# Altium PCB BoardA.PcbDoc
Units mm, origin at the board's own origin, x right, y up, seen from the top; angles counter-clockwise.
Board outline 38.39 x 38.39 mm, 4 copper layers (Top Layer, Int1, Int2, Bottom Layer), stack 1.622 mm thick; 85 components, 48 nets, 258 pads, 4 vias.
Unrouted connection lines stored in the file: 193.
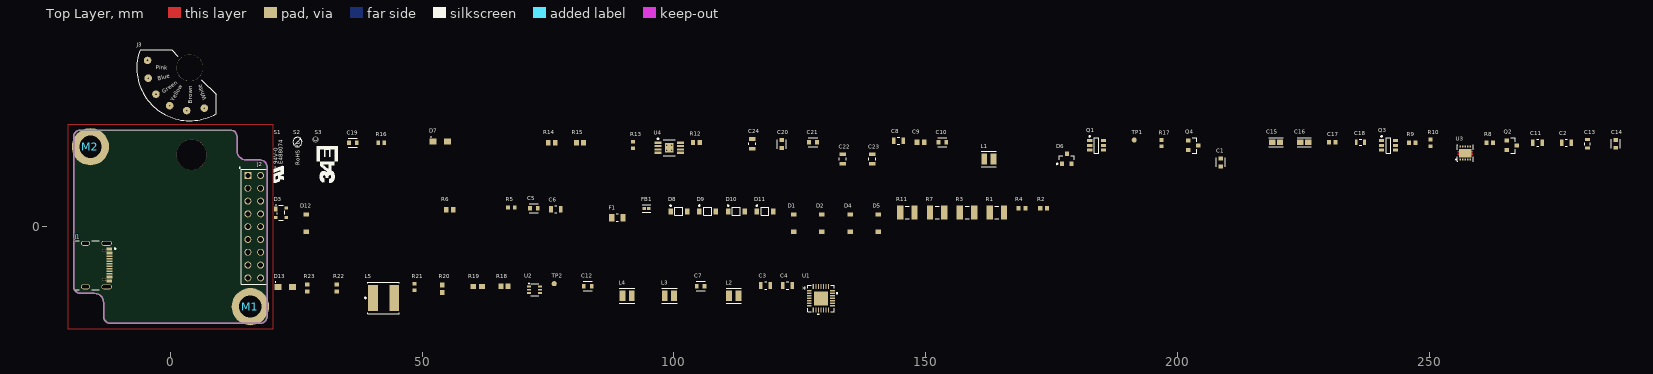
[diagram p0: Top Layer view]
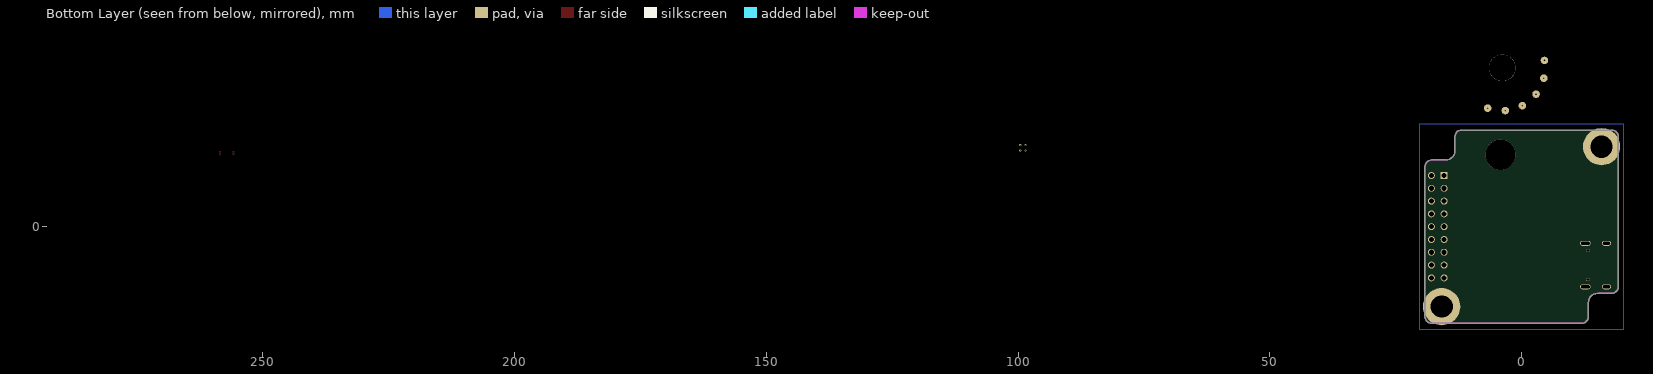
[diagram p1: Bottom Layer view, seen from below]
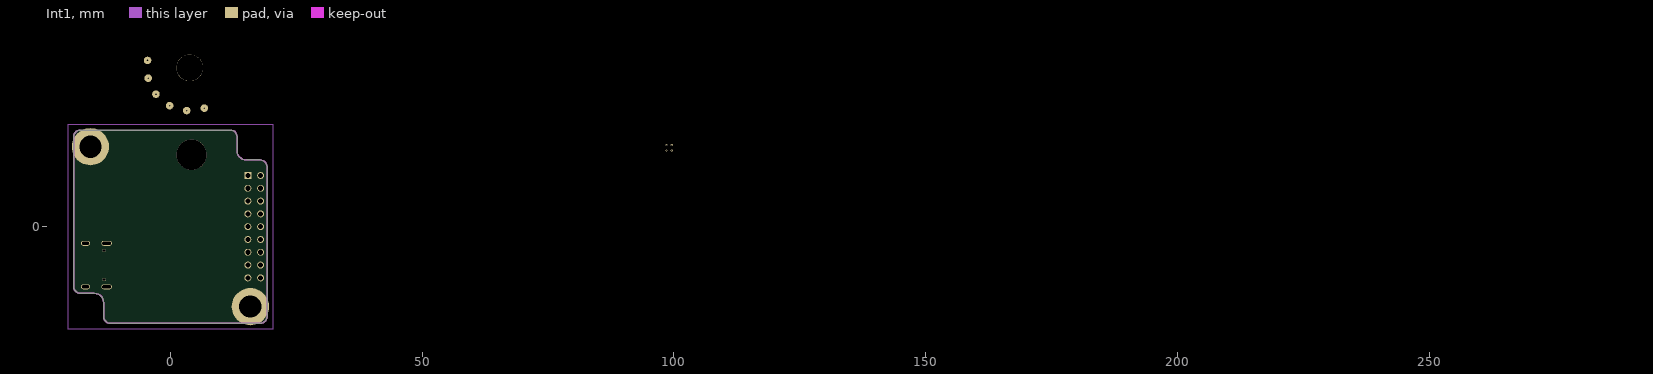
[diagram p2: Int1]
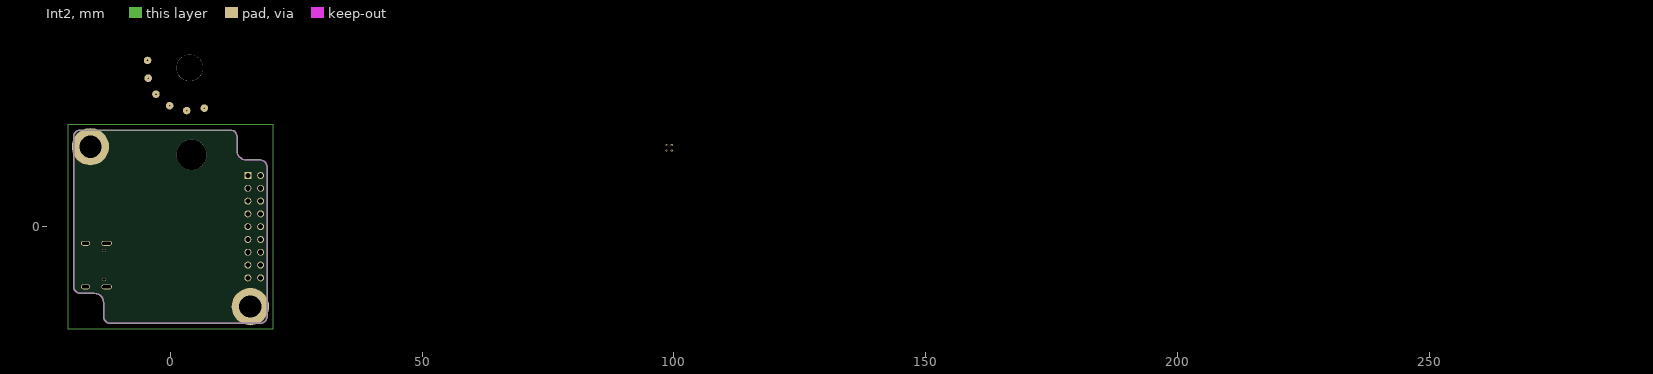
[diagram p3: Int2]

## Layer stack, top to bottom
Top Solder: solder mask 0.0254, SM-002, Dk 4
Top Layer: signal copper 0.07
Dielectric 1: prepreg 0.1092, PP-017, Dk 4.3
Int1: signal copper 0.035
Dielectric 3: core 1.1938, Core-039, Dk 4.8
Int2: signal copper 0.035
Dielectric 5: prepreg 0.1092, PP-017, Dk 4.3
Bottom Layer: signal copper 0.07
Bottom Solder: solder mask 0.0254, SM-002, Dk 4

## Board outline
-19.193,-11.906 -19.159,-12.203 -19.061,-12.485 -18.902,-12.738 -18.691,-12.949 -18.438,-13.108 -18.156,-13.206 -17.859,-13.24 -15.081,-13.24 -14.671,-13.286 -14.282,-13.422 -13.933,-13.642 -13.642,-13.933 -13.422,-14.282 -13.286,-14.671 -13.24,-15.081 -13.24,-17.859 -13.206,-18.156 -13.108,-18.438 -12.949,-18.691 -12.738,-18.902 -12.485,-19.061 -12.203,-19.159 -11.906,-19.193 17.859,-19.193 18.156,-19.159 18.438,-19.061 18.691,-18.902 18.902,-18.691 19.061,-18.438 19.159,-18.156 19.193,-17.859 19.193,11.906 19.159,12.203 19.061,12.485 18.902,12.738 18.691,12.949 18.438,13.108 18.156,13.206 17.859,13.24 15.081,13.24 14.671,13.286 14.282,13.422 13.933,13.642 13.641,13.933 13.422,14.282 13.286,14.671 13.24,15.081 13.24,17.859 13.206,18.156 13.108,18.438 12.949,18.691 12.738,18.902 12.485,19.061 12.203,19.159 11.906,19.193 -17.859,19.193 -18.156,19.159 -18.438,19.061 -18.691,18.902 -18.902,18.691 -19.061,18.438 -19.159,18.156 -19.193,17.859

## Design rules (kind name [scope] priority, off if disabled: settings)
BoardOutlineClearance [IsPolygon] p1: gap=0.025 ignorepadtopadclearanceinfootprint=FALSE
Clearance [All] p1: gap=0.203 ignorepadtopadclearanceinfootprint=FALSE except(0.152: Arc-Text Arc-Hole Track-Text Track-Hole SMDPad-Text SMDPad-Hole THPad-Text THPad-Hole Via-Text Via-Hole Fill-Text Fill-Hole Poly-Text Poly-Hole Region-Text Region-Hole Text-Text Text-Hole)
DiffPairsRouting DiffPairsRouting_USB [InDifferentialPair('USB')] p1: maxlimit=1.016 minlimit=0.254 mostfreqgap=1.016 toplayer_maxgap=0.254 toplayer_prefgap=0.254 toplayer_minwidth=0.157 toplayer_maxwidth=0.157 toplayer_prefwidth=0.157 midlayer1_mingap=1.016 midlayer1_minwidth=0.154 midlayer1_maxwidth=0.154 midlayer1_prefwidth=0.154 midlayer2_mingap=1.016 midlayer2_minwidth=0.154 midlayer2_maxwidth=0.154 midlayer2_prefwidth=0.154 bottomlayer_maxgap=0.254 bottomlayer_prefgap=0.254 bottomlayer_minwidth=0.157 bottomlayer_maxwidth=0.157 bottomlayer_prefwidth=0.157 impedanceprofiledriven=TRUE impedanceprofileid={CBCFBFA0-D2E2-4D45-9055-C7C9E9EC4FAF} impedanceprofilevalue=90.000000 maxuncoupledlength=12.7
HoleSize [All] p1: absolutevalues=TRUE maxlimit=254 minlimit=0.3 maxpercent=80.000 minpercent=20.000
HoleToHoleClearance HoleToHoleClearance_Via [isVia] p1: gap=0.279 allowstackedmicrovias=TRUE
HoleToHoleClearance [Not isVia] p2: gap=0.406 allowstackedmicrovias=TRUE
MinimumSolderMaskSliver [All] p1: minsoldermaskwidth=0.127
PlaneConnect [All] p1: planeconnectstyle=Direct reliefexpansion=0.508 reliefentries=4 reliefconductorwidth=0.254 reliefairgap=0.254
PolygonConnect PolygonConnect_ThruPin [IsThruPin] p1: thpad.connectstyle=Relief thpad.reliefconductorwidth=0.508 thpad.reliefentries=4 thpad.polygonreliefangle="45 Angle" thpad.airgapwidth=0.254 smdpad.connectstyle=Direct smdpad.reliefconductorwidth=0.254 smdpad.reliefentries=4 smdpad.polygonreliefangle="90 Angle" smdpad.airgapwidth=0.254 via.connectstyle=Relief via.reliefconductorwidth=0.254 via.reliefentries=4 via.polygonreliefangle="90 Angle" via.airgapwidth=0.254
PolygonConnect [All] p2: connectstyle=Direct reliefconductorwidth=0.254 reliefentries=4 polygonreliefangle="90 Angle" airgapwidth=0.254
RoutingVias [All] p1: holewidth=0.3 width=0.6 viastyle="Through Hole" minholewidth=0.3 minwidth=0.6 maxholewidth=3 maxwidth=6
SilkToSilkClearance [All] p1: silktosilkclearance=0
SilkToSolderMaskClearance [IsPad] p1: minsilkscreentomaskgap=0.152 clearancetoexposedcopper=TRUE
SolderMaskExpansion SolderMaskExpansion_Via [IsVia] p1: expansion=0.102 istentingtop=TRUE
SolderMaskExpansion [Not IsVia] p2: expansion=0.051 istentingtop=FALSE
Width [All] p1: maxlimit=2.032 minlimit=0.203 preferedwidth=0.254 minimp=50.000000 maximp=50.000000 favimp=50.000000
23 further rules are at their usual default settings.

## Classes and differential pairs
differential pair class USB: USB
differential pair USB: +USB_P -USB_N

## Components (designator, comment, footprint, x,y, rotation, side; value= is the part's Value field where it differs from the comment)
C1 "10uF" FP-GRM188-0_2-MFG 208.585,12.751 r90 top
C2 "22uF" FP-GRM21B-0_15-MFG 277.19,16.662 r0 top
C3 "22uF" FP-GRM21B-0_15-MFG 118.212,-11.684 r0 top
C4 "22uF" FP-GRM21B-0_15-MFG 122.53,-11.684 r0 top
C5 "10uF" FP-GRM188-0_2-MFG 72.161,3.683 r0 top
C6 "22uF" FP-GRM21B-0_15-MFG 76.53,3.429 r0 top
C7 "10uF" FP-GRM188-0_2-MFG 105.308,-11.786 r0 top
C8 "22uF" FP-GRM21B-0_15-MFG 144.602,17.018 r0 top
C9 "15pF" CAPC1608X90X35ML10T15 148.971,16.764 r0 top
C10 "10uF" FP-GRM188-0_2-MFG 153.289,16.764 r0 top
C11 "22uF" FP-GRM21B-0_15-MFG 271.501,16.662 r0 top
C12 "10uF" FP-GRM188-0_2-MFG 82.88,-11.786 r0 top
C13 "100nF" FP-CGA3E-0_3-0_1-IPC_C 281.407,16.459 r90 top
C14 "10uF" FP-GRM188-0_2-MFG 286.995,16.459 r90 top
C15 "1uF" FP-0603-L_1_6_0_1-W_0_8_0-IPC_A 219.558,16.764 r0 top
C16 "1uF" FP-0603-L_1_6_0_1-W_0_8_0-IPC_A 225.146,16.764 r0 top
C17 "120pF" CAPC1608X87X35LL15T15 230.734,16.764 r0 top
C18 "100nF" FP-CGA3E-0_3-0_1-IPC_C 236.322,16.764 r0 top
C19 "10uF" FP-GRM188-0_2-MFG 36.246,16.688 r0 top
C20 "10uF" FP-GRM188-0_2-MFG 121.412,16.408 r90 top
C21 "10uF" FP-GRM188-0_2-MFG 127.61,16.764 r0 top
C22 "22uF" FP-GRM21B-0_15-MFG 133.502,13.437 r90 top
C23 "22uF" FP-GRM21B-0_15-MFG 139.344,13.437 r90 top
C24 "22uF" FP-GRM21B-0_15-MFG 115.519,16.459 r90 top
D1 "ATV02W360B-HF" ATV02W 123.749,0.711 r90 top
D2 "ATV02W360B-HF" ATV02W 129.362,0.711 r90 top
D3 "PRTR5V0U2X,215" NXP-SOT143B-4_V 21.971,2.794 r0 top
D4 "ATV02W360B-HF" ATV02W 134.976,0.711 r90 top
D5 "ATV02W360B-HF" ATV02W 140.589,0.711 r90 top
D6 "BZX84C12LT1G" ONSC-SOT-23-3-318-08_V 178.003,13.462 r90 top
D7 "SS26FL" SS26FL 53.619,16.891 r0 top
D8 "MMSZ5226BT1G" ONSC-SOD-123-2-425-04_V 100.965,3.023 r0 top
D9 "MMSZ5226BT1G" ONSC-SOD-123-2-425-04_V 106.68,3.023 r0 top
D10 "MMSZ5226BT1G" ONSC-SOD-123-2-425-04_V 112.395,3.023 r0 top
D11 "MMSZ5226BT1G" ONSC-SOD-123-2-425-04_V 118.085,3.023 r0 top
D12 "ATV02W360B-HF" ATV02W 26.975,0.711 r90 top
D13 "SS26FL" SS26FL 22.809,-11.963 r0 top
F1 "0.75A(H)/1.5A(T)" FP-0ZCK0075FF2E-MFG 88.748,1.778 r0 top
FB1 "10R/100MHz" FP-BLM15-0_05-IPC_A 94.539,3.607 r0 top
J1 "USB4105-GF-A" FP-USB4105-GF-A-MFG -15.682,-7.62 r270 top locked
J2 "TSW-109-07-G-D" TSW-109-07-G-D 16.653,0 r270 top locked
J3 "Technokabel 0162 031 05" "Technokabel 0162 031 05" 3.838,31.533 r0 top
L1 "1.5uH" FP-DFE252012C-IPC_C 162.535,13.437 r0 top
L2 "1.5uH" FP-DFE252012C-IPC_C 111.862,-13.691 r0 top
L3 "1.5uH" FP-DFE252012C-IPC_C 99.111,-13.691 r0 top
L4 "1.5uH" FP-DFE252012C-IPC_C 90.678,-13.691 r0 top
L5 "10uH" FP-VLS6045EX-100M-MFG 42.342,-14.148 r0 top
M1 "9774110960R" 9774110960R 15.875,-15.875 r0 top locked
M2 "9774110960R" 9774110960R -15.875,15.875 r0 top locked
Q1 "DMP3056LDM-7" SOT95P285X130-6N 183.921,16.129 r0 top
Q2 "ZXM61N03FTA" FP-SOT23-MFG 266.319,16.129 r0 top
Q3 "DMP3056LDM-7" SOT95P285X130-6N 241.884,16.129 r0 top
Q4 "ZXM61N03FTA" FP-SOT23-MFG 203.098,16.129 r0 top
R1 "100" RESC3225X70X50NL20T20 164.109,2.819 r0 top
R2 "5.1k" RESC1608X55X30NL15T15#1 173.406,3.658 r0 top
R3 "100" RESC3225X70X50NL20T20 158.191,2.819 r0 top
R4 "5.1k" RESC1608X55X30NL15T15#1 169.088,3.658 r0 top
R5 "10k" RESC1609X55X30LL15T15 67.716,3.81 r0 top
R6 "14k" RESC1608X55X30ML15T15 55.474,3.353 r0 top
R7 "100" RESC3225X70X50NL20T20 152.273,2.819 r0 top
R8 "10k" RESC1609X55X30LL15T15 262.001,16.688 r0 top
R9 "10k" RESC1609X55X30LL15T15 246.583,16.688 r0 top
R10 "10k" RESC1609X55X30LL15T15 250.215,16.637 r90 top
R11 "100" RESC3225X70X50NL20T20 146.355,2.819 r0 top
R12 "88.7k" RESC1608X55X30NL15T15#1 104.445,16.688 r0 top
R13 "10k" RESC1609X55X30LL15T15 91.872,16.231 r90 top
R14 "59k" RESC1608X55X30ML15T15 75.743,16.688 r0 top
R15 "100k" RESC1608X55X30ML20T20 81.382,16.688 r0 top
R16 "1M" RESC1608X55X30LL15T15 41.859,16.688 r0 top
R17 "9.31k" RESC1608X55X30LL15T15 196.799,16.586 r90 top
R18 "100k" RESC1608X55X30ML20T20 66.345,-11.862 r0 top
R19 "120k" RESC1609X55X30ML15T15 61.011,-11.862 r0 top
R20 "47k" RESC1608X55X30NL15T15#2 53.975,-12.319 r90 top
R21 "10k" RESC1609X55X30LL15T15 48.489,-11.963 r90 top
R22 "5.1k" RESC1608X55X30NL15T15#1 33.02,-12.167 r90 top
R23 "953" RESC1608X55X30NL15T15#1 27.178,-12.167 r90 top
S1 "" UL 21.438,12.268 r90 top
S2 "" RoHS 25.248,14.884 r90 top
S3 "" 34EngineeringLogo 33.579,8.357 r90 top
TP1 "" TestPoint1mm 191.389,17.221 r90 top
TP2 "" TestPoint1mm 76.225,-11.328 r90 top
U1 "MAX20029ATIF/V+" MAX20029ATIF/V+ 129.184,-14.224 r0 top
U2 "DZDH0401DW-7" DZDH0401DW-7 72.314,-12.522 r0 top
U3 "TCKE812NL,RF" WSON10B_TOS 257.124,14.605 r90 top
U4 "LM2738XMY/NOPB" DGN0008A_N 99.06,15.672 r0 top

## Footprints (in the part's own frame and the unit in brackets; to place one, negate y for a bottom-side part, rotate by r counter-clockwise, add the part's x,y. Pads: shape width x height; smd on the part's side, far side on the other; paste and mask are expansions set on the pad)
34EngineeringLogo [mm]
  silkscreen extent 0.33,0.32 7.61,4.55
9774110960R [mm]
  round 7.4 hole 4.4 unplated: 1(0,0)
  body extent -3,-3 3,3, height 11
ATV02W [mil]
  rect 34x44 smd paste+0 mask+0: 1(-67,0) 2(67,0)
  body extent -76,-36 76,36, height 32
CAPC1608X87X35LL15T15 [mm] "Chip Capacitor, 2-Leads, Body 1.60x0.80mm, IPC High Density"
  rect 0.8x0.9 smd: 1(-0.625,0) 2(0.625,0)
  body extent -0.87,-0.48 0.87,0.48, height 0.87
CAPC1608X90X35ML10T15 [mm] "Chip Capacitor, 2-Leads, Body 1.60x0.80mm, IPC Low Density"
  rect 0.95x1.05 smd: 1(-0.725,0) 2(0.725,0)
  body extent -0.85,-0.45 0.85,0.45, height 0.9
DGN0008A_N [mm] "TSOP, 8-Leads, Body 3.1x3.1mm, Pitch 0.65mm, Thermal Pad 1.85x1.73mm, IPC Medium Density"
  rrect22% 1.35x0.45 smd: 1(-2.225,0.975) 2(-2.225,0.325) 3(-2.225,-0.325) 4(-2.225,-0.975) 5(2.225,-0.975) 6(2.225,-0.325) 7(2.225,0.325) 8(2.225,0.975)
  rrect6% 1.73x1.85 smd: 9(0,0)
  silkscreen extent -2.35,-1.55 1.15,1.9, body extent -2.45,-1.5 2.45,1.5, height 0.94
DZDH0401DW-7 [mil]
  rect 30.81x14 smd paste+0 mask+0: 1(-41.9,25.59) 2(-41.9,0) 3(-41.9,-25.59) 4(41.9,-25.59) 5(41.9,0) 6(41.9,25.59)
  silkscreen extent -45,-48 32,50, body extent -43,-44 43,44, height 43
FP-0ZCK0075FF2E-MFG [mm]
  rect 1x1.5 smd paste+0 mask+0: 1(-1.1,0) 2(1.1,0)
  silkscreen extent -0.23,-0.75 0.23,0.75, body extent -1.7,-0.85 1.7,0.85, height 0.25
FP-0603-L_1_6_0_1-W_0_8_0-IPC_A [mm]
  rect 1.258x1.012 smd paste+0 mask+0: 1(-0.777,0) 2(0.777,0)
  silkscreen extent -1.41,-0.91 1.41,0.91, body extent -1.91,-1.01 1.91,1.01, height 0.25
FP-BLM15-0_05-IPC_A [mm]
  rect 0.715x0.672 smd paste+0 mask+0: 1(-0.479,0) 2(0.479,0)
  silkscreen extent -0.84,-0.74 0.84,0.74, body extent -1.04,-0.54 1.04,0.54, height 0.25
FP-CGA3E-0_3-0_1-IPC_C [mm]
  rect 0.556x1.006 smd paste+0 mask+0: 1(-0.825,0) 2(0.825,0)
  silkscreen extent -0.25,-0.55 0.25,0.55, body extent -1.2,-0.65 1.2,0.65, height 0.25
FP-DFE252012C-IPC_C [mm]
  rect 1.155x2.106 smd paste+0 mask+0: 1(-0.926,0) 2(0.926,0)
  silkscreen extent -1.5,-1.5 1.5,1.5, body extent -1.6,-1.2 1.6,1.2, height 0.25
FP-GRM21B-0_15-MFG [mm]
  rect 0.7x1.3 smd paste+0 mask+0: 1(-0.95,0) 2(0.95,0)
  silkscreen extent -0.23,-0.7 0.23,0.7, body extent -1.4,-0.8 1.4,0.8, height 0.25
FP-GRM188-0_2-MFG [mm]
  rect 0.75x0.9 smd paste+0 mask+0: 1(-0.775,0) 2(0.775,0)
  silkscreen extent -0.9,-0.9 0.9,0.9, body extent -1.25,-0.6 1.25,0.6, height 0.25
FP-SOT23-MFG [mm]
  rect 0.9x0.8 smd paste+0 mask+0: 1(-1,0.95) 2(-1,-0.95) 3(1,0)
  silkscreen extent -0.18,-1.5 0.7,1.5, body extent -1.55,-1.6 1.55,1.6, height 0.25
FP-USB4105-GF-A-MFG [mm]
  rrect100% 1x2.1 hole 1.7 slot 0.6 at 0 deg paste-1000 mask+0: 1(-4.32,3.015) 2(4.32,3.015)
  rrect100% 1x1.8 hole 1.4 slot 0.6 at 0 deg paste-1000 mask+0: 3(-4.32,-1.165) 4(4.32,-1.165)
  rect 0.584x1.092 smd paste+0 mask+0: A1-B12(-3.2,3.59) B1-A12(3.2,3.59)
  rect 0.584x1.15 smd paste+0 mask+0: A4-B9(-2.4,3.59) B4-A9(2.4,3.59)
  rect 0.292x1.15 smd paste+0 mask+0: A5(-1.25,3.59) A6(-0.25,3.59) A7(0.25,3.59) A8(1.25,3.59) B5(1.75,3.59) B6(0.75,3.59) B7(-0.75,3.59) B8(-1.75,3.59)
  round 0.65 hole 0.65 unplated paste-1000 mask+0: ""(-2.89,2.515) ""(2.89,2.515)
  silkscreen extent -4.86,-3.24 4.86,4.84, body extent -4.96,-3.94 4.96,4.27, height 0.25
FP-VLS6045EX-100M-MFG [mm]
  rect 1.9x5.1 smd paste+0 mask+0: 1(-2.1,0) 2(2.1,0)
  silkscreen extent -3.72,-3.15 3.15,3.15, body extent -3.25,-3.25 3.25,3.25, height 0.25
MAX20029ATIF/V+ [mil]
  rect 38x10 smd paste+0 mask+0: 1(-91.5,59.06) 2(-91.5,39.37) 3(-91.5,19.68) 4(-91.5,0) 5(-91.5,-19.68) 6(-91.5,-39.37) 7(-91.5,-59.06) 15(91.5,-59.06) 16(91.5,-39.37) 17(91.5,-19.68) 18(91.5,0) 19(91.5,19.68) 20(91.5,39.37) 21(91.5,59.06)
  rect 10x38 smd paste+0 mask+0: 8(-59.06,-91.5) 9(-39.37,-91.5) 10(-19.68,-91.5) 11(0,-91.5) 12(19.68,-91.5) 13(39.37,-91.5) 14(59.06,-91.5) 22(59.06,91.5) 23(39.37,91.5) 24(19.68,91.5) 25(0,91.5) 26(-19.68,91.5) 27(-39.37,91.5) 28(-59.06,91.5)
  rect 110x110 smd paste-54.5 mask+0: 29(0,0)
  silkscreen extent -104,-130 130,104, body extent -99,-99 99,99, height 32
NXP-SOT143B-4_V [mm] "SOT143, 4-Leads, Body 3x1.4mm"
  rect 0.7x1 smd: 1(-1,0.75)
  rect 0.7x0.6 smd: 2(-1,-0.95) 3(1,-0.95) 4(1,0.95)
  silkscreen extent -1.05,-1.5 0.7,1.6, body extent -0.7,-1.5 0.7,1.5, height 1.1
ONSC-SOD-123-2-425-04_V [mm] "SOD, 2-Leads, Body 2.69x1.6mm"
  rect 0.91x1.22 smd: 1(-1.635,0) 2(1.635,0)
  silkscreen extent -1.76,-0.8 0.78,1.28, body extent -1.35,-0.8 1.35,0.8, height 1.35
ONSC-SOT-23-3-318-08_V [mm] "SOT23, 3-Leads, Body 2.92x1.3mm, Pitch 0.95mm"
  rect 0.9x0.8 smd: 1(-1,0.95) 2(-1,-0.95) 3(1,0)
  silkscreen extent -1.12,-1.46 0.65,2.02, body extent -0.65,-1.46 0.65,1.46, height 1.11
RESC1608X55X30LL15T15 [mm] "Chip Resistor, 2-Leads, Body 1.60x0.80mm, IPC High Density"
  rect 0.7x0.85 smd: 1(-0.625,0) 2(0.625,0)
  body extent -0.87,-0.48 0.87,0.48, height 0.55
RESC1608X55X30ML15T15 [mm] "Chip Resistor, 2-Leads, Body 1.60x0.80mm, IPC Low Density"
  rect 0.9x1.05 smd: 1(-0.725,0) 2(0.725,0)
  body extent -0.87,-0.48 0.87,0.48, height 0.55
RESC1608X55X30ML20T20 [mm] "Chip Resistor, 2-Leads, Body 1.60x0.80mm, IPC Low Density"
  rect 1x1.1 smd: 1(-0.7,0) 2(0.7,0)
  body extent -0.9,-0.5 0.9,0.5, height 0.55
RESC1608X55X30NL15T15#1 [mm] "Chip Resistor, 2-Leads, Body 1.60x0.80mm, IPC Medium Density"
  rect 0.8x0.95 smd: 1(-0.675,0) 2(0.675,0)
  body extent -0.87,-0.48 0.87,0.48, height 0.55
RESC1608X55X30NL15T15#2 [mm] "Chip Resistor, 2-Leads, Body 1.75x0.95mm, IPC Medium Density"
  rect 0.95x0.95 smd: 1(-0.75,0) 2(0.75,0)
  body extent -0.87,-0.48 0.87,0.48, height 0.55
RESC1609X55X30LL15T15 [mm] "Chip Resistor, 2-Leads, Body 1.75x0.95mm, IPC High Density"
  rect 0.75x0.85 smd: 1(-0.65,0) 2(0.65,0)
  body extent -0.87,-0.48 0.87,0.48, height 0.55
RESC1609X55X30ML15T15 [mm] "Chip Resistor, 2-Leads, Body 1.75x0.95mm, IPC Low Density"
  rect 1.15x1.05 smd: 1(-0.85,0) 2(0.85,0)
  body extent -0.87,-0.48 0.87,0.48, height 0.55
RESC3225X70X50NL20T20 [mm] "Chip Resistor, 2-Leads, Body 3.20x2.50mm, IPC Medium Density"
  rect 1.25x2.7 smd: 1(-1.425,0) 2(1.425,0)
  silkscreen extent -0.4,-1.25 0.4,1.25, body extent -1.7,-1.35 1.7,1.35, height 0.7
RoHS [mm]
  silkscreen extent 1.05,-0.9 2.85,0.9
SOT95P285X130-6N [mm] "SOT23, 6-Leads, Body 3.00x2.85mm, Pitch 0.95mm, IPC Medium Density"
  rect 1.05x0.6 smd: 1(-1.375,0.95) 2(-1.375,0) 3(-1.375,-0.95) 4(1.375,-0.95) 5(1.375,0) 6(1.375,0.95)
  silkscreen extent -1.5,-1.55 0.45,1.92, body extent -1.5,-1.55 1.5,1.55, height 1.3
SS26FL [mm] "SODFL, 2-Leads, Body 1.73x3.60mm, IPC Medium Density"
  rect 1.4x1.15 smd: 1(-1.45,0) 2(1.45,0)
  silkscreen extent -1.96,0.88 -1.85,1, body extent -1.8,-0.97 1.8,0.97, height 1.08
"Technokabel 0162 031 05" [mm]
  round 1.5 hole 0.32: 1(-8.371,1.476) 2(-8.248,-2.056) 3(-6.698,-5.233) 4(-3.991,-7.505) 5(-0.593,-8.479) 6(2.907,-7.987)
  round 5.3 hole 5.3 unplated: /(0,0)
  silkscreen extent -10.5,-10.5 5.25,3.59
TestPoint1mm [mm]
  round 1 smd: 1(0,0)
TSW-109-07-G-D [mm]
  rect 1.37x1.37 hole 1.02: 1(-10.16,-1.27)
  round 1.37 hole 1.02: 2(-7.62,-1.27) 3(-5.08,-1.27) 4(-2.54,-1.27) 5(0,-1.27) 6(2.54,-1.27) 7(5.08,-1.27) 8(7.62,-1.27) 9(10.16,-1.27) 10(-10.16,1.27) 11(-7.62,1.27) 12(-5.08,1.27) 13(-2.54,1.27) 14(0,1.27) 15(2.54,1.27) 16(5.08,1.27) 17(7.62,1.27) 18(10.16,1.27)
  silkscreen extent -11.81,-2.96 11.43,2.4, body extent -11.43,-2.54 11.43,2.54, height 8.38
UL [mm]
  silkscreen extent -3.57,-1.1 -0.22,0.93
WSON10B_TOS [mm]
  rect 0.4x0.279 smd paste+0 mask+0: 1(-1.3,1) 2(-1.3,0.5) 3(-1.3,0) 4(-1.3,-0.5) 5(-1.3,-1) 6(1.3,-1) 7(1.3,-0.5) 8(1.3,0) 9(1.3,0.5) 10(1.3,1)
  rect 1.65x2.4 smd paste+0 mask+0: 11(0,0)
  Top Layer region: 0.14,-1.194 0.368,-1.194 0.368,-1.537 0.14,-1.537
  Top Layer region: -0.14,-1.194 -0.368,-1.194 -0.368,-1.537 -0.14,-1.537
  Top Layer region: 0.14,1.194 0.368,1.194 0.368,1.537 0.14,1.537
  Top Layer region: -0.14,1.194 -0.368,1.194 -0.368,1.537 -0.14,1.537
  silkscreen extent -1.63,-1.63 1.63,1.85, body extent -1.5,-1.54 1.5,1.54, height 0.71

## Part data
C1 C5 C7 C10 C12 C14 C19 C20 C21: library part CMP-2006-02520-2, "Chip Multilayer Ceramic Capacitors for General Purpose, 0603, 10uF, X5R, 15%, 20%, 25V", Case Code (Imperial)=0603, Case Code (Metric)=1608, Dielectric=X5R, Max Operating Temperature=85°C, Min Operating Temperature=-55°C, Package Quantity=1, Resistor Type=Ceramic, Tolerance=20%, Voltage=25V, Capacitance=10uF, Case/Package=0603, Depth=0.8mm, Height=0.8mm, Lead Free="Lead Free", Length=1.6mm, Mount="Surface Mount", Number of Pins=2, Packaging="Tape and Reel", REACH SVHC="No SVHC", Termination=SMD/SMT, Thickness=0.031inch, Voltage Rating=25V, Voltage Rating (DC)=25V, Weight=0.000222oz, Width=0.031inch
C2 C3 C4 C6 C8 C11 C22 C23 C24: library part CMP-2007-03385-2, "Chip Multilayer Ceramic Capacitors for General Purpose, 0805, 22uF, X5R, 15%, 20%, 6.3V", Case Code (Imperial)=0805, Case Code (Metric)=2012, Dielectric=X5R, Max Operating Temperature=85°C, Min Operating Temperature=-55°C, Package Quantity=1, Tolerance=20%, Voltage=6.3V, Capacitance=22uF, Case/Package=0805, Depth=1.25mm, Height=1.25mm, Lead Free="Lead Free", Length=2mm, Material=Ceramic, Mount="Surface Mount", Packaging="Tape and Reel", Radiation Hardening=No, REACH SVHC="No SVHC", Termination=SMD/SMT, Thickness=0.053inch, Voltage Rating=6.3V, Voltage Rating (DC)=6.3V, Width=0.049inch
C9: library part CMP-2006-02610-1, Manufacturer=Murata, Part Number=GRM1885C1H150JA01D
C13 C18: library part CMP-2000-07546-2, "Cap Ceramic 100nF 50V X7R 10% Pad SMD 0603 +125°C Automotive T/R", Case Code (Imperial)=0603, Case Code (Metric)=1608, Dielectric=X7R, Max Operating Temperature=125°C, Min Operating Temperature=-55°C, Package Quantity=1, Ratings=AEC-Q200, Tolerance=10%, Voltage=50V, Capacitance=100nF, Case/Package=0603, Composition=Ceramic, Depth=0.8mm, Height=0.8mm, Lead Free="Lead Free", Length=1.6mm, Mount="Surface Mount", Packaging="Tape and Reel", Radiation Hardening=No, REACH SVHC="No SVHC", Termination=SMD/SMT, Thickness=0.035inch, Voltage Rating=50V, Voltage Rating (DC)=50V, Weight=7.1E-05oz, Width=0.8mm
C15 C16: library part CMP-2000-05447-3, "None", Case Code (Imperial)=0603, Case Code (Metric)=1608, Dielectric=X5R, Max Operating Temperature=85°C, Min Operating Temperature=-55°C, Package Quantity=1, Tolerance=10%, Voltage Rating=50V, Capacitance=1uF, Case/Package=0603, Construction=Flat, Contact Plating=Nickel, Depth=0.8mm, Halogen Free="Halogen Free", Height=0.8mm, Length=1.6mm, Mount="Surface Mount", Number of Pins=2, Packaging="Tape and Reel", Radiation Hardening=No, RoHS Compliant=Yes, Series=M, Termination=SMD/SMT, Thickness=0.035inch, Voltage Rating (DC)=50V, Width=0.031inch
C17: library part CMP-2006-03074-1, Manufacturer=Kemet, Part Number=C0603C121J5GACTU
D1 D2 D4 D5 D12: "No Description Available", Mfr_Name=Comchip, Copyright="Copyright (C) 2022 Ultra Librarian. All rights reserved.", Manufacturer_Part_Number=ATV02W360B-HF, RefDes=RefDes, Type=DEV
D3: library part CMP-2000-05285-1, "Ultra Low Capacitance Double Rail-to-Rail ESD Protection Diode, 5.5 V, 1 pF, -40 to 85 degC, 4-Pin SOT143B, RoHS, Tape and Reel", Capacitance Value=16pF, ESD Protection Voltage=8KV@ContactDisc, Leakage Current=0.1uA, Manufacturer="NXP Semiconductors", Operating Temp Range=-40Cto85C, Operating Temperature Classification=Industrial, Operating Temperature Max Deg. C=85C, Operating Temperature Min Deg. C=-40C, Package / Case=SOT, Reverse Breakdown Voltage=6V, Reverse Stand-off Voltage=5.5V, Configuration=Quad, Datasheet URL=https://datasheet.ciiva.com/4479/prtr5v0u2x-102853-4479461.pdf, Datasheet Version="Rev. 02, 01/2008", Direction Type=Uni-Directional, Leakage Current (Max)=0.1uA, Manufacturer URL=http://www.nxp.com/, Mounting=SurfaceMount, Mounting Style=SurfaceMount, Number of Elements=1, Package Type=SOT, Packaging=TapeandReel, Pin Count=3+Tab, Polarity=Uni-Directional, Product Depth (mm)=1.4mm, Product Height (mm)=1mm, Product Length (mm)=3mm, Rad Hardened=No, Suppressor Type=DiodeArrays, Working Voltage=5.5V, Working Voltage (Max)=5.5V
D6: library part CMP-1060-00857-1, "Zener Voltage Regulator, 225 mW, 3-Pin SOT-23, Pb-Free, Tape and Reel", Manufacturer="On Semiconductor", ComponentLink1Description="Manufacturer URL", ComponentLink1URL=http://www.onsemi.com/, ComponentLink2Description=Datasheet, ComponentLink2URL=http://www.onsemi.com/pub_link/Collateral/BZX84C2V4LT1-D.PDF, ComponentLink3Description="Package Specification", ComponentLink3URL=http://www.onsemi.cn/pub_link/Collateral/318-08.PDF, DatasheetVersion="Rev. 17", Mounting Technology="Surface Mount", PackageDescription="3-Pin Small Outline Transistor, Body 2.92 x 1.3 mm, Pitch 0.95 mm", PackageReference=SOT-23-3-318-08, PackageVersion="Rev. AP, 11/2009", Packing="Tape and Reel", PartNumber=BZX84C12LT1G, RoHS=Pb-Free
D7 D13: "Diode Schottky Barrier Rectifier 60V 2A 2-Pin SOD-123F T/R", Average Rectified Current=2A, Case/Package=SOD, Manufacturer="ON Semiconductor / Fairchild", Max Forward Surge Current (Ifsm)=50A, Max Repetitive Reverse Voltage (Vrrm)=60V, Category="Rectifier Diodes", ComponentLink1Description=http://www.farnell.com/datasheets/2552652.pdf?src-supplier=Farnell, ComponentLink1URL=http://www.farnell.com/datasheets/2552652.pdf?src-supplier=Farnell, ComponentLink2Description=https://www.fairchildsemi.com/datasheets/SS/SS24FL.pdf?src-supplier=Digi-Key, ComponentLink2URL=https://www.fairchildsemi.com/datasheets/SS/SS24FL.pdf?src-supplier=Digi-Key, ComponentLink3Description=http://www.farnell.com/datasheets/2552652.pdf?src-supplier=Element14, ComponentLink3URL=http://www.farnell.com/datasheets/2552652.pdf?src-supplier=Element14, ComponentLink4Description=http://www.farnell.com/datasheets/2552652.pdf?src-supplier=Newark, ComponentLink4URL=http://www.farnell.com/datasheets/2552652.pdf?src-supplier=Newark, Element Configuration=Single, Manufacturer Part Number=SS26FL, Max Reverse Voltage (DC)=60V, Mount="Surface Mount", Packaging="Tape and Reel", Pricing 1="3000=0.09160, 6000=0.09070, 9000=0.07910, 12000=0.07830, 15000=0.07750, 24000=0.07030 (USD)", Reverse Recovery Time=8.26ns, RoHS=Yes, RoHS Compliant=Yes, Stock 1=288000, Supplier 1="Arrow Electronics", Supplier Part Number 1=SS26FL, Weight=0.0276g
D8 D9 D10 D11: library part CMP-1060-00363-1, "Zener Voltage Regulator, 500 mW, 2-Pin SOD-123, Pb-Free, Tape and Reel", Manufacturer="On Semiconductor", ComponentLink1Description="Manufacturer URL", ComponentLink1URL=http://www.onsemi.com/, ComponentLink2Description=Datasheet, ComponentLink2URL=http://www.onsemi.com/pub_link/Collateral/MMSZ5221BT1-D.PDF, ComponentLink3Description="Package Specification", ComponentLink3URL=http://www.onsemi.com/pub_link/Collateral/425-04.PDF, DatasheetVersion="Rev. 12", Mounting Technology="Surface Mount", P Max (W)=0.5, PackageDescription="2-Pin SOD, Body 1.6 x 2.69 mm", PackageReference=SOD-123-2-425-04, PackageVersion="Rev. G, 10/2009", Packing="Tape and Reel", PartNumber=MMSZ5226BT1G, RoHS=Pb-Free, VZ Typ (V)=3.3
F1: library part CMP-16043-000005-1, "PTC RESET FUSE 6V 750MA 0805", Case Code (Imperial)=0805, Case Code (Metric)=2012, Hold Current=750mA, Max Current Rating=40A, Package Quantity=1, Trip Current=1.5A, Case/Package=0805, Lead Free="Lead Free", Packaging="Tape and Reel", Time to Trip=0.2s
FB1: library part CMP-0686-00176-4, "Chip Ferrite Bead, 0402, 10Ω @ 100MHz, 0.025Ω, 25%, 1A", Case Code (Imperial)=0402, Case Code (Metric)=1005, Current Rating=1A, DC Resistance (DCR)=25mR, Max Operating Temperature=125°C, Min Operating Temperature=-55°C, Package Quantity=1, Resistance=50mR, Resistor Type="Ferrite Bead", Test Frequency=100MHz, Tolerance=25%, Case/Package=0402, Core Material=Ferrite, DC Current=1A, Depth=0.55mm, Height=0.5mm, Impedance=10R, Lead Free="Lead Free", Length=1mm, Material=Ferrite, Max Current Rating=1A, Max DC Current=1A, Military Standard=Not, Number of Circuits=1, Number of Lines=1, Number of Pins=2, Packaging="Tape and Reel", Radiation Hardening=No, REACH SVHC="No SVHC", RoHS Compliant=Yes, Shielding=Unshielded, Termination=SMD/SMT, Weight=2.3E-05oz, Width=0.5mm
J1: library part CMP-245163-000001-1, "CONN RCPT USB2.0 TYPEC 5A", Current Rating=5/6.25/1.25/0.25A, Manufacturer=GCT, Package=0, Temperature="-40°C to +85°C", Temperature Range High=+85°C, Temperature Range Low=-40°C, Voltage Rating=20V, Automotive=No, Category=Conn, ComponentLink2Description=Datasheet, ComponentLink2URL=https://gct.co/files/drawings/usb4105.pdf, Conn Orientation="Right Angle", Contact Material=Gold,Nickel, Device Class L1=Connectors, Device Class L2="USB Connectors", Device Class L3=unset, Digikey Description="CONN RCPT USB2.0 TYPEC 5A", Height=3.46mm, Is Female=yes, Lead Free=Yes, Manufacturer Part Number=USB4105-GF-A, Number of Contacts=16, Octopart=https://octopart.com/usb4105-gf-a-gct-106627878, RoHS=TRUE, Usb Standard="USB 2.0"
J2: "Conn Unshrouded Header HDR 18 POS 2.54mm Solder ST Thru-Hole", Color=Black, Manufacturer=Samtec, Max Current Rating=7.6A, Max Operating Temperature=125°C, Max Voltage Rating (AC)=550V, Min Operating Temperature=-55°C, Supplier Part Number 1=SAM1028-09-ND, Category=Connectors, ComponentLink1Description=https://datasheet.ciiva.com/10198/htsw-th-10198345.pdf?src-supplier=Avnet, ComponentLink1URL=https://datasheet.ciiva.com/10198/htsw-th-10198345.pdf?src-supplier=Avnet, ComponentLink2Description=https://datasheet.ciiva.com/16701/htsw-th-16701221.pdf?src-supplier=Avnet+Europe, ComponentLink2URL=https://datasheet.ciiva.com/16701/htsw-th-16701221.pdf?src-supplier=Avnet+Europe, Connector Type="Male Pin", Contact Material=Bronze, Contact Mating Length=0.23inch, Contact Plating=Gold, Contact Type="Male Pin", Depth=5.08mm, Gender=Male, Housing Color=Black, Housing Material=Polyester, Lead Free="Lead Free", Length=22.86mm, Manufacturer Part Number=TSW-109-07-G-D, Mount="Through Hole", Number of Contacts=18, Number of Positions=18, Number of Rows=2, Orientation=Straight, Packaging=Bulk, Pitch=2.54mm, Pricing 1="1=1.81000, 10=1.64100, 25=1.54000, 50=1.47320, 100=1.40620, 250=1.27224, 500=1.17180 (USD)", Radiation Hardening=No, REACH SVHC="No SVHC", RoHS=Yes, RoHS Compliant=Yes, Row Spacing=0.1inch, Series=TSW, Stock 1=676, Supplier 1=Digi-Key, Termination=Solder, Width=5.08mm
L1 L2 L3 L4: library part CMP-06042-006881-1, "Shielded Wirewound Inductor 1.5uH 20% 2600mA 0.06Ω 1008 (2520)", Case Code (Imperial)=1008, Case Code (Metric)=2520, Current Rating=3.5A, DC Resistance (DCR)=60mR, Max DC Current=2.6A, Max Operating Temperature=125°C, Min Operating Temperature=-40°C, Resistor Type=Wirewound, Test Frequency=1MHz, Tolerance=20%, Case/Package=1008, Core Material=Ferrite, Depth=2mm, Height - Seated (Max)=0.039inch, Inductance=1.5uH, Length=0.098inch, Mount="Surface Mount", Packaging="Tape and Reel", Shielding=Shielded, Width=0.079inch
L5: library part CMP-08253-000184-1, "FIXED IND 10UH 3.4A 61 MOHM SMD", Case/Package=Nonstandard, Current Rating=3.4A, DC Resistance (DCR)=61mR, Inductance Tolerance=20%, Max Operating Temperature=105°C, Min Operating Temperature=-40°C, Resistor Type=Wirewound, Saturation Current=3.9A, Test Frequency=100kHz, Core Material=Ferrite, Height - Seated (Max)=0.177inch, Inductance=10uH, Lead Free="Lead Free", Length=0.236inch, Mount="Surface Mount", Packaging="Cut Tape", REACH SVHC="No SVHC", RMS Current (Irms)=3.4A, RoHS Compliant=Yes, Shielding=Shielded, Tolerance=20%, Width=0.236inch
M1 M2: "WURTH ELEKTRONIK         9774110960R             Spacer, SMT, Swage Round, Steel, 6x11mm", Manufacturer="Wurth Electronics", Manufacturer Part Number=9774070960R, Category="Spacers, Standoffs", ComponentLink1Description=http://www.mouser.com/ds/2/445/9774070960R-611130.pdf?src-supplier=Mouser, ComponentLink1URL=http://www.mouser.com/ds/2/445/9774070960R-611130.pdf?src-supplier=Mouser, ComponentLink2Description=http://www.farnell.com/datasheets/1960400.pdf?src-supplier=Farnell, ComponentLink2URL=http://www.farnell.com/datasheets/1960400.pdf?src-supplier=Farnell, ComponentLink3Description=https://media.digikey.com/pdf/Data%20Sheets/Wurth%20Electronics%20PDFs/WA-SMSx_Performance_Flyer.pdf?src-supplier=Digi-Key, ComponentLink3URL=https://media.digikey.com/pdf/Data%20Sheets/Wurth%20Electronics%20PDFs/WA-SMSx_Performance_Flyer.pdf?src-supplier=Digi-Key, ComponentLink4Description=http://www.farnell.com/datasheets/1960400.pdf?src-supplier=Newark, ComponentLink4URL=http://www.farnell.com/datasheets/1960400.pdf?src-supplier=Newark, ComponentLink5Description=http://www.farnell.com/datasheets/1960400.pdf?src-supplier=Element14, ComponentLink5URL=http://www.farnell.com/datasheets/1960400.pdf?src-supplier=Element14, ComponentLink6Description=http://www.mouser.com/ds/2/445/9774110960R-611133.pdf?src-supplier=Mouser, ComponentLink6URL=http://www.mouser.com/ds/2/445/9774110960R-611133.pdf?src-supplier=Mouser, ComponentLink7Description=http://www.farnell.com/datasheets/1960407.pdf?src-supplier=Farnell, ComponentLink7URL=http://www.farnell.com/datasheets/1960407.pdf?src-supplier=Farnell, ComponentLink8Description=http://www.farnell.com/datasheets/1960407.pdf?src-supplier=Element14, ComponentLink8URL=http://www.farnell.com/datasheets/1960407.pdf?src-supplier=Element14, Inside Diameter=0.13inch, Length=0.33inch, Material=Steel, Outside Diameter=0.236inch, Plating=Tin, Pricing 1="1=1.73000, 10=1.65800, 50=1.45600, 100=1.35500 (USD)", Pricing 2="1=2.14000, 10=2.05100, 50=1.79700, 100=1.66900 (USD)", REACH SVHC=Unknown, RoHS=Yes, Stock 1=8947, Stock 2=2072, Supplier 1=Digi-Key, Threaded/Unthreaded=Unthreaded
Q1 Q3: "Trans Mosfet P-ch 30V 4.3A 6-PIN SOT-26 T/r / Mosfet P-ch 30V 4.3A SOT-26", Case/Package=SOT-26-6, Continuous Drain Current (ID)=4.3A, Drain to Source Breakdown Voltage=-30V, Drain to Source Resistance=45mR, Drain to Source Voltage (Vdss)=30V, Gate to Source Voltage (Vgs)=10V, Input Capacitance=948pF, Manufacturer=Diodes, Manufacturer_Part_Number=DMG4407SSS-13, Max Operating Temperature=150°C, Max Power Dissipation=1.5W, Mfr_Name="Diodes Inc", Min Operating Temperature=-55°C, Package Quantity=3000, Category=MOSFETs, ComponentLink1Description=https://datasheet.ciiva.com/935/ds31449-935056.pdf?src-supplier=Digi-Key, ComponentLink1URL=https://datasheet.ciiva.com/935/ds31449-935056.pdf?src-supplier=Digi-Key, ComponentLink2Description=https://datasheet.ciiva.com/935/ds31449-935055.pdf?src-supplier=Digi-Key, ComponentLink2URL=https://datasheet.ciiva.com/935/ds31449-935055.pdf?src-supplier=Digi-Key, ComponentLink3Description=https://datasheet.ciiva.com/935/ds31449-935057.pdf?src-supplier=Digi-Key, ComponentLink3URL=https://datasheet.ciiva.com/935/ds31449-935057.pdf?src-supplier=Digi-Key, ComponentLink4Description=https://datasheet.ciiva.com/11176/ds31449-11176470.pdf?src-supplier=Avnet, ComponentLink4URL=https://datasheet.ciiva.com/11176/ds31449-11176470.pdf?src-supplier=Avnet, ComponentLink5Description=https://datasheet.ciiva.com/8115/ds31449-8115483.pdf?src-supplier=Avnet, ComponentLink5URL=https://datasheet.ciiva.com/8115/ds31449-8115483.pdf?src-supplier=Avnet, Copyright="Copyright (C) 2022 Ultra Librarian. All rights reserved.", Element Configuration=Single, Fall Time=22.3ns, Height=1.1mm, Lead Free="Lead Free", Length=3mm, Manufacturer Part Number=DMP3056LDM-7, Mount="Surface Mount", Number of Channels=1, Number of Elements=1, Number of Pins=6, Packaging="Cut Tape", Polarity=P-CHANNEL, Power Dissipation=1.5W, Pricing 1="1=0.31620, 10=0.31310, 25=0.30990, 100=0.23530, 250=0.23300, 500=0.20610, 1000=0.19360, 3000=0.17330 (USD)", Radiation Hardening=No, Rds On Max=45mR, REACH SVHC="No SVHC", RefDes=RefDes, Rise Time=6.6ns, RoHS=Yes, RoHS Compliant=Yes, Series=DMP3056, Stock 1=366, Supplier 1="Arrow Electronics", Supplier Part Number 1=DMP3056LDM-7, Turn-Off Delay Time=50.1ns, Turn-On Delay Time=10.2ns, Type=DEV, Weight=0.000529oz, Width=1.6mm
Q2 Q4: library part CMP-12801-000012-1, "MOSFET N-CH 30V 1.4A SOT23-3", Continuous Drain Current=1.4A, Drain to Source Breakdown Voltage=30V, Drain to Source Resistance=0.22Ω, Gate To Source Voltage=20V, Input Capacitace At Vds="150pF @ 25V", Manufacturer="Diodes Inc.", Max Forward Diode Voltage=0.95V, Max Junction Temp=+150°C, Package=SOT23, Power Dissipation=625mW, Pulse Drain Current=7.3A, Temperature="-55°C to +150°C", Temperature Range Low=-55°C, Automotive=No, Category=Trans, ComponentLink2Description=Datasheet, ComponentLink2URL=https://www.diodes.com/assets/Datasheets/ZXM61N03F.pdf, Depletion Mode=False, Device Class L1="Discrete Semiconductors", Device Class L2=Transistors, Device Class L3=MOSFETs, Digikey Description="MOSFET N-CH 30V 1.4A SOT23-3", Drain To Source Voltage=30V, Footprint Url=https://www.diodes.com/assets/Package-Files/SOT23.pdf, Gate Charge At Vgs="4.1nC @ 10V", Height=1.1mm, Lead Free=Yes, Manufacturer Part Number=ZXM61N03FTA, Mouser Description="MOSFET 30V N-Chnl HDMOS", Number of Channels=1, Number Of N Channels=1, Octopart=https://octopart.com/zxm61n03fta-diodes+inc.-660007, Reverse Recovery Charge=3.5nC, Reverse Recovery Time=11ns, RoHS=TRUE, Rthja Max=200°C/W, Standoff Height=0.013mm, Temperature Range High=+150°C, Threshold Vgs Min=1V, Turn Off Delay Time=5.8ns, Turn On Delay Time=1.9ns
R1 R3 R7 R11: library part CMP-2005-03643-1, Manufacturer=Panasonic, Part Number=ERJ-P14J101U
R2 R4 R22: library part CMP-2000-00540-1, Manufacturer=Panasonic, Part Number=ERJ-3EKF5101V
R5 R8 R9 R10 R13 R21: library part CMP-1012-00623-3, "Chip Resistor, 10 KOhm, +/- 1%, 0.1 W, -55 to 155 degC, 0603 (1608 Metric), RoHS, Tape and Reel", Case Code (Imperial)=0603, Case Code (Metric)=1608, Manufacturer=Panasonic, Max Operating Temperature=155degC, Max Power Dissipation=100mW, Min Operating Temperature=-55degC, Package Description="2-Pin Surface Mount Device, Body 1.6 x 0.85 mm", Package Quantity=1, Package Reference=603, Resistance=10KOhm, Temperature Coefficient=100ppm\/degreesC, Tolerance=1%, Voltage Rating=75V, Case\/Package=0603, Composition=ThickFilm, Contact Plating=Tin, Datasheet URL=https://industrial.panasonic.com/cdbs/www-data/pdf/RDA0000/AOA0000C304.pdf, Datasheet Version=02/2017, Depth=0.8mm, Height=0.45mm, Lead Free=LeadFree, Length=1.6mm, Manufacturer URL=http://www.panasonic.com/, Military Standard=Not, Mount=SurfaceMount, Mounting Technology=SurfaceMount, Number of Pins=2, Number of Terminations=2, Packaging=TapeandReel, Power Rating=100mW, Radiation Hardening=No, REACH SVHC=NoSVHC, RoHSCompliant=true, Termination=SMD/SMT, Voltage Rating (DC)=75V, Width=0.031inch
R6: library part CMP-2000-00247-1, Manufacturer=Panasonic, Part Number=ERJ-3EKF1402V
R12: library part CMP-2000-00676-1, Manufacturer=Panasonic, Part Number=ERJ-3EKF8872V
R14: library part CMP-2000-00581-1, Manufacturer=Panasonic, Part Number=ERJ-3EKF5902V
R15 R18: library part CMP-2000-00875-1, Manufacturer=Panasonic, Part Number=ERA3AEB104V
R16: library part CMP-1012-00849-2, Manufacturer=Panasonic, Part Number=ERJ-3EKF1004V
R17: library part CMP-2000-00689-1, Manufacturer=Panasonic, Part Number=ERJ-3EKF9311V
R19: library part CMP-2000-00216-2, "Chip Resistor, 120 KOhm, +/- 1%, 0.1 W, -55 to 155 degC, 0603 (1608 Metric), RoHS, Tape and Reel", Case Code (Imperial)=0603, Case Code (Metric)=1608, Manufacturer=Panasonic, Max Operating Temperature=155degC, Max Power Dissipation=100mW, Min Operating Temperature=-55degC, Package Description="2-Pin Surface Mount Device, Body 1.6 x 0.85 mm", Package Quantity=1, Resistance=120KOhm, Temperature Coefficient=100ppm/degC, Tolerance=1%, Voltage Rating=75V, Case/Package=0603, Composition=ThickFilm, Contact Plating=Tin, Datasheet URL=https://industrial.panasonic.com/cdbs/www-data/pdf/RDA0000/AOA0000C283.pdf, Datasheet Version=42095.0, Depth=0.8mm, Height=0.022inch, Lead Free=LeadFree, Length=1.6mm, Manufacturer URL=http://www.panasonic.com/, Military Standard=Not, Mount=SurfaceMount, Number of Pins=2, Number of Terminations=2, Package Reference=0603, Package URL=http://www.st.com/st-web-ui/static/active/en/resource/technical/document/datasheet/CD00001320.pdf, Packaging=TapeandReel, Power Rating=100mW, Radiation Hardening=No, REACH SVHC=NoSVHC, RoHSCompliant=True, Termination=SMD/SMT, Voltage Rating (DC)=75V, Width=0.8mm
R20: library part CMP-2000-00523-2, "Chip Resistor, 47 KOhm, +/- 1%, 0.1 W, -55 to 155 degC, 0603 (1608 Metric), RoHS, Tape and Reel", Case Code (Imperial)=0603, Case Code (Metric)=1608, Colour=Red, Forward Current="20 mA", Forward Voltage="2.1 V", Max Operating Temperature="100 degC", Min Operating Temperature="-40 degC", Package Quantity=3000, Power Rating="90 mW", Case\Package=0603, ComponentLink1Description="Manufacturer URL", ComponentLink1URL=http://www.panasonic.com/, ComponentLink2Description=Datasheet, ComponentLink2URL=http://industrial.panasonic.com/cdbs/www-data/pdf/RDA0000/AOA0000C86.pdf, DatasheetVersion=Apr-15, Height="0.6 mm", Illumination Colour=Red, Length="1.6 mm", Lens Style=Clear, Luminous Intensity="63 mcd", Mount="Surface Mount", Nominal Vf="2.1 V", Nominal Wavelength="639 nm", PackageDescription="2-Pin Surface Mount Device, Body 1.6 x 0.85 mm", PackageReference=0603, Packaging="Tape and Reel", Pins=2, Radiation Hardening=No, REACH SVHC="No SVHC", RoHSCompliant=true, Viewing Angle="160 degrees", Width="0.8 mm"
R23: library part CMP-1012-00508-2, Manufacturer=Panasonic, Part Number=ERJ-3EKF9530V
S1: library part UL
S2: library part RoHS
S3: library part 34EngineeringLogo, "34 Engineering Silkscreen Logo"
TP1 TP2: library part TestPoint1mm, "Test Point 1mm Diameter"
U1: "DC to DC Converter Quad Step-Down 3V to 5.5V Automotive 28-Pin TQFN Tube", Manufacturer=Maxim, Mfr_Name="Maxim Integrated Products", Supplier Part Number 1=700-MAX20029ATIF/V+, Copyright="Copyright (C) 2022 Ultra Librarian. All rights reserved.", Manufacturer Part Number=MAX20029ATIF/V+, Manufacturer_Part_Number=MAX20029ATIF/V+, Pricing 1="1=3.71000, 10=3.34000, 25=3.15000, 50=3.15000, 100=3.15000, 120=2.72000, 300=2.64000, 540=2.41000, 1000=2.41000, 1020=2.29000, 2520=2.25000, 10000=2.25000 (USD)", RefDes=RefDes, RoHS=Yes, Stock 1=121, Supplier 1=Mouser, Type=DEV
U2: "Ideal Diode Controller 40V 300mA 300mW 6-Pin SOT-363 T/R", Manufacturer=Diodes, Mfr_Name="Diodes Inc", Supplier Part Number 1=621-DZDH0401DW-7, Copyright="Copyright (C) 2022 Ultra Librarian. All rights reserved.", Manufacturer Part Number=DZDH0401DW-7, Manufacturer_Part_Number=DZDH0401DW-7, Pricing 1="1=0.43000, 10=0.32400, 50=0.32400, 100=0.17000, 500=0.13800, 1000=0.10600, 3000=0.09000, 10000=0.09000 (USD)", RefDes=RefDes, RoHS=Yes, Stock 1=1625, Supplier 1=Mouser, Type=DEV
U3: "5.1V Voltage Clmp Latch Type", Manufacturer=Toshiba, Manufacturer Part Number=TCKE812NLRF, Supplier Part Number 1=655L16112I2T-ND, RoHS=Yes, Supplier 1=Digi-Key
U4: library part CMP-0069-01694-3, "550kHz/1.6MHz 1.5A Step-Down DC-DC Switching Regulator, 8-pin eMSOP, Pb-Free", Manufacturer="Texas Instruments", PackageTopMarking=ZXTT*STDB, PowerWise=N, Code_JEDEC=MO-187-AA, ComponentLink1Description="Datasheet URL", ComponentLink1URL=http://www.ti.com/general/docs/lit/getliterature.tsp?genericPartNumber=LM2738&fileType=pdf, CompType=Switcher, PackageDescription="Molded Mini-SO, Exposed Pad, .118 x .118 x .034in Body, 8 Lead, .0256in Pitch", PackageReference=DGN0008A, PinCount=8, RoHS=Y

## Free pads (board coordinates)
  round 6 hole 6 unplated: 1(4.21,14.287)

## Via types
v1: diameter 0.4, hole 0.2, Top Layer to Bottom Layer, tented both sides, 4 vias

## Nets (pads, with @x,y where several pads share a name; then routed paths per layer and width w, separated by ;. In a path a pad name is that pad's centre, name@x,y a point inside that pad or via, vN(x,y) a via of type N, cw(c..) or ccw(c..) an arc to the next point about the centre after c; other vN are vias at no path point)
1.8V_EN: R8.1 U1.9 U1.27
1.8V_LX: L2.1 U1.6
1.8V_OUTS: C6.1 J2.11 L2.2 U1.8
1.8V_PG: R9.1 U1.10 U1.13
1V_EN: C1.1 C5.1 C7.1 C10.1 J2.9 Q1.1 Q1.2 Q1.5 Q1.6 R8.2 R9.2 R10.2 R13.2 U1.1 U1.2 U1.7 U1.15 U1.20 U2.4
1V_LX: L1.1 U1.3
1V_OUTS: C2.1 C3.1 C4.1 J2.2 L1.2 U1.28
2.5V_LX: L3.1 U1.16
2.5V_OUTS: C9.2 R12.2 R14.2 U1.14
2.5V_PG: R10.1 U1.12 U1.21
3.3V_LX: L4.1 U1.19
3.3V_OUTS: C11.1 J2.18 L4.2 R21.1 U1.22
3.3V_PG: R13.1 TP1.1 U1.23
+2.5: C8.1 C9.1 J2.10 L3.2 R12.1
+5_CAB: C22.1 C23.1 C24.1 D7.2 L5.2 R22.2
+5_USB: C14.1 FB1.2 Q1.4 R5.2 TP2.1 U2.6
+5_USB_UNF: C13.1 F1.2 FB1.1
+5_USB_UNP: D3.4 F1.1 J1.A4-B9 J1.B4-A9
+12_CAB: C15.2 C19.1 C20.1 C21.1 J2.1 Q2.2 U4.2 U4.3 U4.4
+12_CAB_UNP: D12.2 J3.1 Q3.4
GND: C1.2 C2.2 C3.2 C4.2 C5.2 C6.2 C7.2 C8.2 C10.2 C11.2 C12.2 C13.2 C14.2 C15.1 C16.1 C17.1 C19.2 C20.2 C21.2 C22.2 C23.2 C24.2 D1.2 D2.2 D3.1 D4.2 D5.2 D8.2 D9.2 D10.2 D11.2 D12.1 D13.2 J1.A1-B12 J1.B1-A12 J2.5 J2.8 J2.12 J2.17 J3.2 Q4.2 R2.2 R4.2 R6.1 R14.1 R15.2 R16.2 R18.1 R19.2 R20.1 R23.1 U1.4 U1.5 U1.11 U1.17 U1.18 U1.24 U1.25 U1.29 U3.11 U4.5 U4.7 U4.9
  other v1: 98.56,15.172 99.56,15.172 98.56,16.172 99.56,16.172
NetC12_1: C12.1 U1.26
NetC16_2: C16.2 D6.3 Q3.1 Q3.2 Q3.5 Q3.6 R17.2 U3.3 U3.4 U3.5
NetC17_2: C17.2 U3.1
NetC18_1: C18.1 D7.1 U4.1
NetC18_2: C18.2 D13.1 L5.1 U4.8
NetD6_1: D6.1 Q3.3 R20.2
NetJ1_A5: J1.A5 R2.1
NetJ1_B5: J1.B5 R4.1
NetQ1_3: Q1.3 R16.1 U2.3
NetQ2_1: Q2.1 Q4.1 U3.9
NetQ2_3: Q2.3 U3.6 U3.7 U3.8
NetR15_1: R15.1 U2.2
NetR17_1: R17.1 R18.2 U3.2
NetR19_1: R19.1 U3.10
NetR22_1: R22.1 R23.2 U4.6
PWR_12V_OFF: J2.3 Q4.3 R21.2
RIO_CS: D8.1 J2.16 R11.2
RIO_CS_UNP: D1.1 J3.6 R11.1
RIO_MISO: D9.1 J2.15 R7.2
RIO_MISO_UNP: D2.1 J3.5 R7.1
RIO_MOSI: D10.1 J2.14 R3.2
RIO_MOSI_UNP: D4.1 J3.4 R3.1
RIO_SCLK: D11.1 J2.13 R1.2
RIO_SCLK_UNP: D5.1 J3.3 R1.1
USB_N: D3.2 J1.A7 J1.B7 J2.6
USB_ON: J2.4 R5.1 R6.2
USB_P: D3.3 J1.A6 J1.B6 J2.7
pads on no net: D6.2 J1. J1.1 J1.2 J1.3 J1.4 J1.A8 J1.B8 J3./ M1.1 M2.1 U2.1 U2.5
copper on no net: | length 0
  Top Layer w0.508: 15.358,-0.025 15.383,0

## Polygon pours and split planes (outlines as drawn)
GND on Int2 "NONET_L03_P000" (solid, shelved, pour order 0): 20.32,20.32 20.32,-20.32 -20.32,-20.32 -20.32,20.32
GND on Int1 "NONET_L02_P001" (solid, shelved, pour order 1): 20.32,20.32 20.32,-20.32 -20.32,-20.32 -20.32,20.32
GND on Top Layer "NONET_L01_P002" (solid, shelved, pour order 2): 20.32,20.32 20.32,-20.32 -20.32,-20.32 -20.32,20.32
GND on Bottom Layer "NONET_L04_P003" (solid, shelved, pour order 3): 20.32,20.32 20.32,-20.32 -20.32,-20.32 -20.32,20.32

## Keep-outs
Keep-Out Layer:
  lines w0.254: -17.859,19.193 -18.156,19.159 -18.438,19.061 -18.691,18.902 -18.902,18.691 -19.061,18.438 -19.159,18.156 -19.193,17.859 -19.193,-11.906 -19.159,-12.203 -19.061,-12.485 -18.902,-12.738 -18.691,-12.949 -18.438,-13.108 -18.156,-13.206 -17.859,-13.24 -15.081,-13.24 -14.671,-13.286 -14.282,-13.422 -13.933,-13.642 -13.642,-13.933 -13.422,-14.282 -13.286,-14.671 -13.24,-15.081 -13.24,-17.859 -13.206,-18.156 -13.108,-18.438 -12.949,-18.691 -12.738,-18.902 -12.485,-19.061 -12.203,-19.159 -11.906,-19.193 17.859,-19.193 18.156,-19.159 18.438,-19.061 18.691,-18.902 18.902,-18.691 19.061,-18.438 19.159,-18.156 19.193,-17.859 19.193,11.906 19.159,12.203 19.061,12.485 18.902,12.738 18.691,12.949 18.438,13.108 18.156,13.206 17.859,13.24 15.081,13.24 14.671,13.286 14.282,13.422 13.933,13.642 13.641,13.933 13.422,14.282 13.286,14.671 13.24,15.081 13.24,17.859 13.206,18.156 13.108,18.438 12.949,18.691 12.738,18.902 12.485,19.061 12.203,19.159

## Text inside footprints (layer, text, board x,y; h text height)
D1: Mechanical 13 "*" at 124.384,-0.775 h1.27 r90
D2: Mechanical 13 "*" at 129.997,-0.775 h1.27 r90
D4: Mechanical 13 "*" at 135.611,-0.775 h1.27 r90
D5: Mechanical 13 "*" at 141.224,-0.775 h1.27 r90
D12: Mechanical 13 "*" at 27.61,-0.775 h1.27 r90
J3: Top Overlay "Yellow" at 0.649,24.791 h0.8 r60; Top Overlay "Blue" at -2.416,28.964 h0.8 r15; Top Overlay "Green" at -1.322,26.351 h0.8 r35; Top Overlay "Brown" at 4.31,24.365 h0.8 r90; Top Overlay "White" at 7.213,25.313 h0.8 r110; Top Overlay "Pink" at -2.855,31.28 h0.8 r357
S1: Top Overlay "E488074" at 22.317,12.348 h0.8 r90; Top Overlay "94V-0" at 21.358,12.348 h0.8 r90
S2: Top Overlay "RoHS Pb" at 25.647,12.219 h0.8 r90
S3: Top Overlay "©" at 29.904,16.461 h2 r90
U1: Top Overlay "*" at 125.425,-13.109 h1.27; Mechanical 13 "*" at 127.025,-13.109 h1.27
U2: Mechanical 13 "*" at 71.704,-12.763 h1.27